# Altium PCB IV_transform_circuit.PcbDoc
Units mil, origin at the board's own origin, x right, y up, seen from the top; angles counter-clockwise.
Board outline 3160 x 1885 mil, 2 copper layers (Top Layer, Bottom Layer); 23 components, 15 nets, 71 pads, 0 vias.
Unrouted connection lines stored in the file: 1.
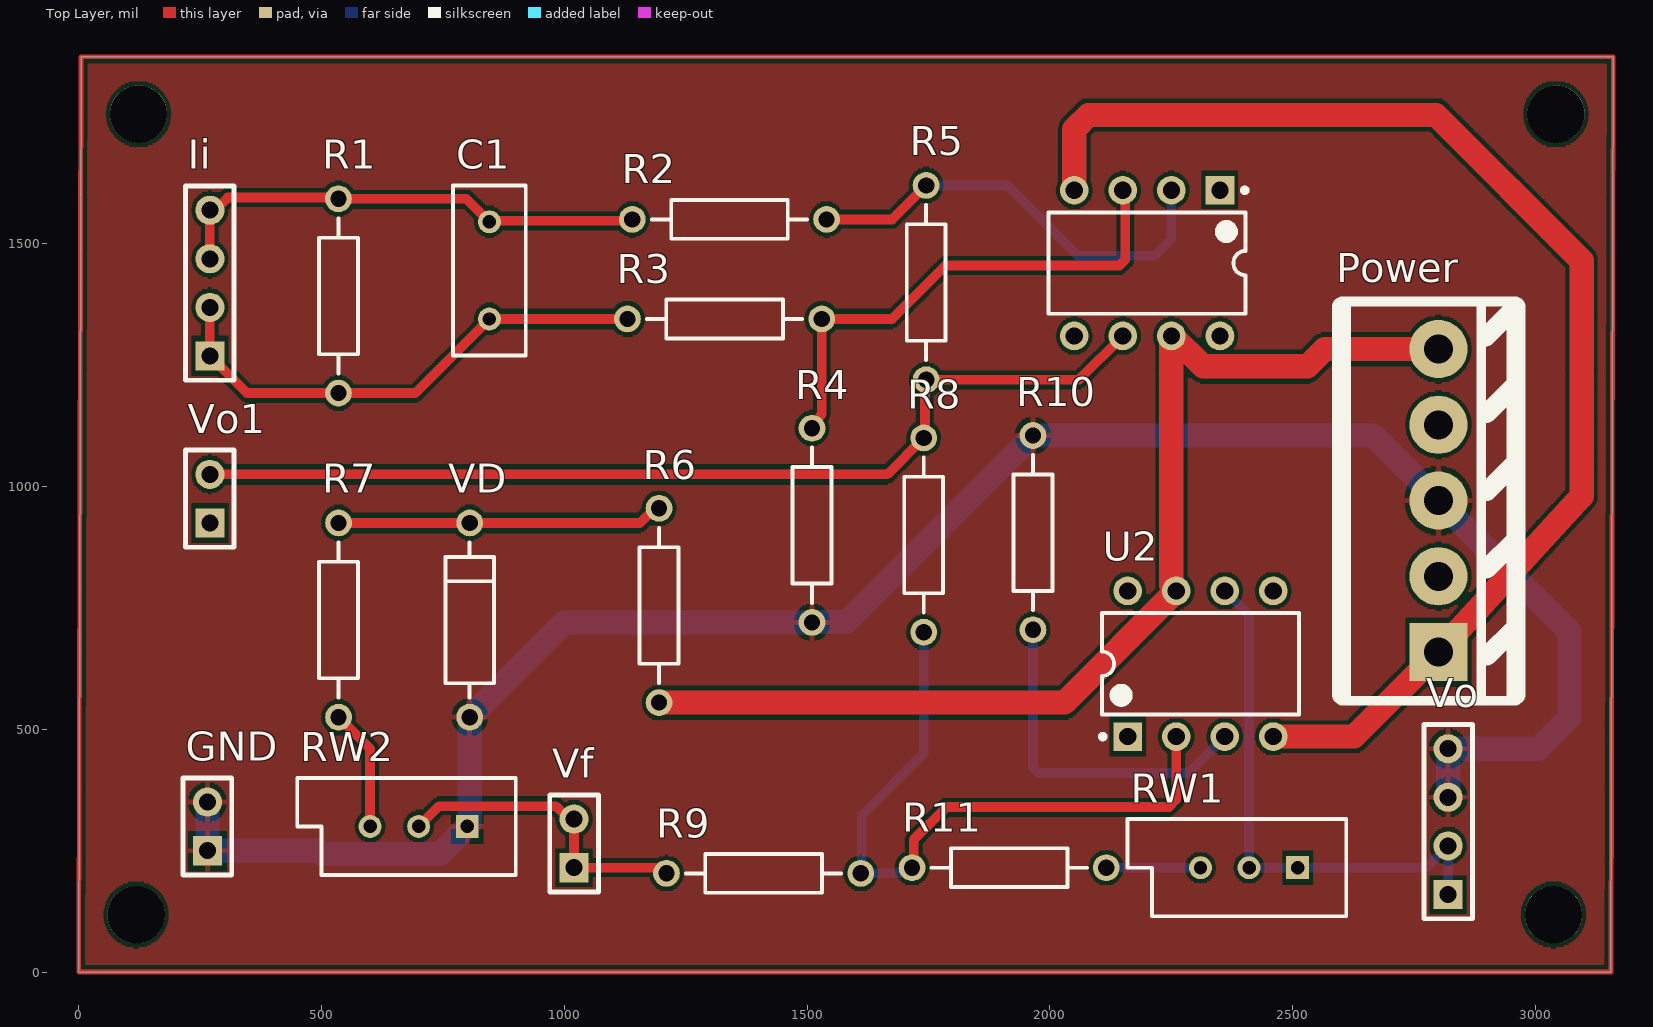
[diagram p0: Top Layer view]
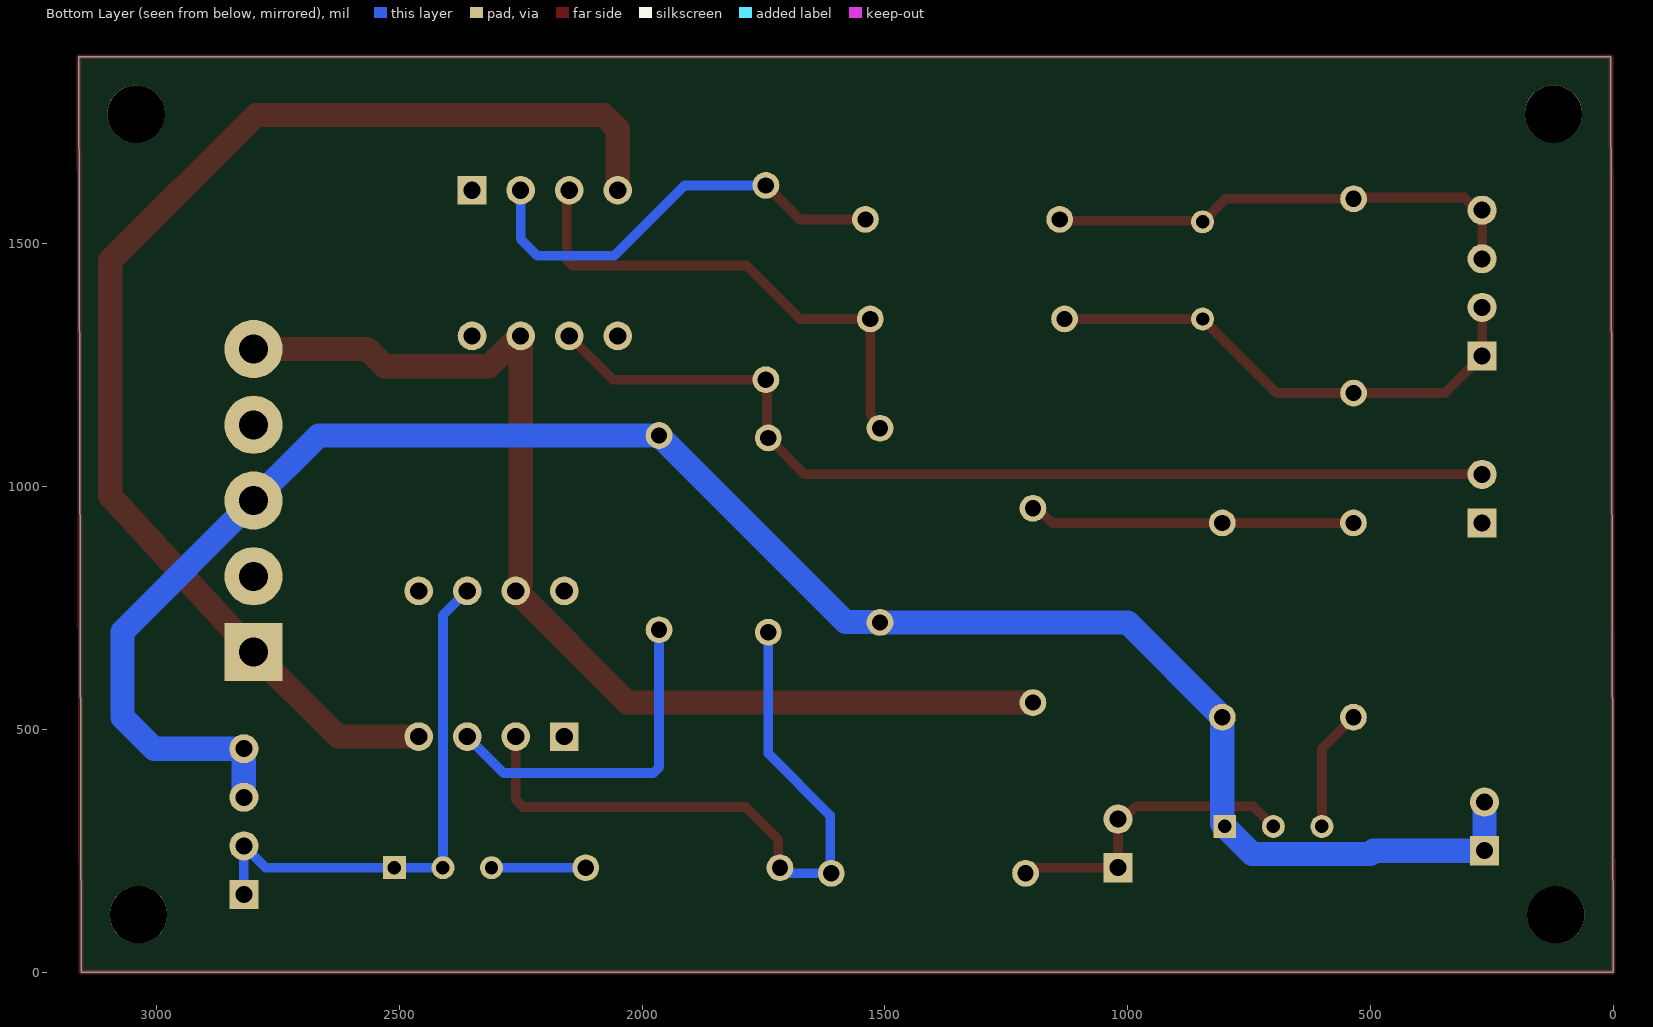
[diagram p1: Bottom Layer view, seen from below]

## Layer stack, top to bottom
Top Solder: solder mask 0.4, Solder Resist, Dk 3.5
Top Layer: signal copper 1.4
Dielectric 1: dielectric 12.6, FR-4, Dk 4.8
Bottom Layer: signal copper 1.4
Bottom Solder: solder mask 0.4, Solder Resist, Dk 3.5

## Board outline
0,0 5,1885 3160,1885 3155,0

## Design rules (kind name [scope] priority, off if disabled: settings)
Clearance ALL [All] p1: gap=8 ignorepadtopadclearanceinfootprint=TRUE
PolygonConnect [All] p1: connectstyle=Relief reliefconductorwidth=10 reliefentries=4 polygonreliefangle="90 Angle" airgapwidth=10
RoutingVias [All] p1: holewidth=20 width=40 viastyle="Through Hole" minholewidth=20 minwidth=40 maxholewidth=20 maxwidth=40
SolderMaskExpansion [All] p1: expansion=2.5 istentingtop=FALSE
Width POWER [InNetClass('POWER')] p1: maxlimit=60 minlimit=30 preferedwidth=50
Width [All] p2: maxlimit=20 minlimit=20 preferedwidth=20
30 further rules are at their usual default settings.

## Classes and differential pairs
net class POWER: +12V -12V GND

## Components (designator, comment, footprint, x,y, rotation, side; value= is the part's Value field where it differs from the comment)
C1 "Cap" RAD-0.2 845.66,1445 r90 top value=100pF
GND "Header 2" SIP-2 265,250 r90 top
Ii "Header 4" SIP-4 270,1268.94 r90 top
Power "Header 5" "POWER PLUG5" 2800,659 r270 top
R1 "" AXIAL-0.4 534.8,1392.38 r90 top value=250
R2 "Res2" AXIAL-0.4 1340,1550 r180 top value=10K
R3 "Res2" AXIAL-0.4 1330,1345 r180 top value=10K
R4 "Res2" AXIAL-0.4 1510,920 r270 top value=10K
R5 "Res2" AXIAL-0.4 1745,1420 r90 top value=10K
R6 "Res2" AXIAL-0.4 1195,755 r270 top value=470
R7 "Res2" AXIAL-0.4 535,725 r90 top value=510
R8 "Res2" AXIAL-0.4 1740,900 r90 top value=10K
R9 "Res2" AXIAL-0.4 1410.3,203.33 r180 top value=10K
R10 "Res2" AXIAL-0.4 1965,905 r90 top value=4.3K
R11 "Res2" AXIAL-0.4 1915.99,215 r180 top value=20K
RW1 "RPot" VR5 2410,215 r180 top value=10K
RW2 "RPot" VR5 700,300 r180 top value=500
U1 "OPAMP" DIP-8 2200,1460 r270 top
U2 "OPAMP" DIP-8 2310,635 r90 top
VD "5.1V" DIODE-0.4 805,725 r90 top
Vf "Header 2" SIP-2 1020,215 r90 top
Vo "Header 4" SIP-4 2820,160 r90 top
Vo1 "Header 2" SIP-2 270,925 r90 top

## Footprints (in the part's own frame and the unit in brackets; to place one, negate y for a bottom-side part, rotate by r counter-clockwise, add the part's x,y. Pads: shape width x height; smd on the part's side, far side on the other; paste and mask are expansions set on the pad)
AXIAL-0.4 [mm] "Axial Device, Thru-Hole; 2 Leads; 0.4 in Pin Spacing"
  round 1.4 hole 0.85: 1(-5.08,0) 2(5.08,0)
  silkscreen extent -4.06,-1.02 4.06,1.02
DIODE-0.4 [mm] "Diode, Thru-Hole; 2 Leads; 0.4 in Pin Spacing"
  round 1.4 hole 0.85: 1(-5.08,0) 2(5.08,0)
  silkscreen extent -4.06,-1.27 4.06,1.27
DIP-8 [mm] "DIP; 8 Leads; Row Spacing 7.62 mm; Pitch 2.54 mm"
  rect 1.5x1.5 hole 0.9: 1(-3.81,3.81)
  round 1.5 hole 0.9: 2(-3.81,1.27) 3(-3.81,-1.27) 4(-3.81,-3.81) 5(3.81,-3.81) 6(3.81,-1.27) 7(3.81,1.27) 8(3.81,3.81)
  silkscreen extent -3.93,-5.15 2.65,5.24, body extent -3.6,-5.15 3.6,5.15, height 5.08
"POWER PLUG5" [mil] "双电源插座"
  rect 120x120 hole 60: 1(0,0)
  round 120 hole 60: 2(-156,0) 3(-312,0) 4(-468,0) 5(-624,0)
  silkscreen extent -722,-200 100,160
RAD-0.2 [mm] "Radial Cap, Thru-Hole; 2 Leads; 0.2 in Pin Spacing"
  round 1.2 hole 0.7: 1(-2.54,0) 2(2.54,0)
  silkscreen extent -4.44,-1.91 4.44,1.91
SIP-2 [mil]
  rect 60x60 hole 35: 1(0,0)
  round 60 hole 35: 2(100,0)
  silkscreen extent -50,-50 150,50
SIP-4 [mil]
  rect 60x60 hole 35: 1(0,0)
  round 60 hole 35: 2(100,0) 3(200,0) 4(300,0)
  silkscreen extent -50,-50 350,50
VR5 [mm] "Thru-Hole; 3 Leads"
  rect 1.2x1.2 hole 0.7: 1(-2.54,0)
  round 1.2 hole 0.7: 2(0,0) 3(2.54,0)
  silkscreen extent -5.08,-2.54 6.35,2.54

## Part data
C1: "Capacitor", LatestRevisionDate=17-Jul-2002, LatestRevisionNote="Re-released for DXP Platform.", PackageDescription="Radial Cap, Thru-Hole; 2 Leads; 0.3 in Pin Spacing", PackageReference=RAD-0.3, Published=8-Jun-2000, Publisher="Altium Limited"
GND Vf Vo1: "Header, 2-Pin", LatestRevisionDate=17-Jul-2002, LatestRevisionNote="Re-released for DXP Platform.", Publisher="Altium Limited"
Ii Vo: "Header, 4-Pin", LatestRevisionDate=17-Jul-2002, LatestRevisionNote="Re-released for DXP Platform.", Publisher="Altium Limited"
Power: "Header, 5-Pin", LatestRevisionDate=17-Jul-2002, LatestRevisionNote="Re-released for DXP Platform.", Publisher="Altium Limited"
R1: library part Res2, "Resistor", LatestRevisionDate=17-Jul-2002, LatestRevisionNote="Re-released for DXP Platform.", PackageDescription="Axial Device, Thru-Hole; 2 Leads; 0.4 in Pin Spacing", PackageReference=AXIAL-0.4, Published=8-Jun-2000, Publisher="Altium Limited"
R2 R3 R4 R5 R6 R7 R8 R9 R10 R11: "Resistor", LatestRevisionDate=17-Jul-2002, LatestRevisionNote="Re-released for DXP Platform.", PackageDescription="Axial Device, Thru-Hole; 2 Leads; 0.4 in Pin Spacing", PackageReference=AXIAL-0.4, Published=8-Jun-2000, Publisher="Altium Limited"
RW1 RW2: "Potentiometer", LatestRevisionDate=17-Jul-2002, LatestRevisionNote="Re-released for DXP Platform.", PackageDescription="Variable Resistor, Thru-Hole; 3 Leads", PackageReference=VR5, Published=8-Jun-2000, Publisher="Altium Limited", Set Position=0.5, Sim Note="Enter the Resistance value and the set point into parameter fields."
U1 U2: "Operational Amplifier"
VD: library part "D Schottky", "Schottky Diode", Code_JEDEC=DO-214-AA, LatestRevisionDate=17-Jul-2002, LatestRevisionNote="Re-released for DXP Platform.", PackageDescription="DO-214-AA/SMB; 2 C-Bend Leads; Body 5.3 x 3.6 mm, inc. leads (LxW)", PackageReference=SMB, Published=8-Jun-2000, Publisher="Altium Limited"

## Free pads (board coordinates)
  round 118.11 hole 118.11 unplated: 3(118.11,118.11) 3(123.11,1766.89) 3(3036.89,118.11) 3(3041.89,1766.89)

## Nets (pads, with @x,y where several pads share a name; then routed paths per layer and width w, separated by ;. In a path a pad name is that pad's centre, name@x,y a point inside that pad or via, vN(x,y) a via of type N, cw(c..) or ccw(c..) an arc to the next point about the centre after c; other vN are vias at no path point)
+12V: Power.5 R6.2 U1.7 U2.7 | length 2280
  Top Layer w50: R6.2 2030,555 U2.7 2260,787.45 2250,797.45 U1.7 2252.45,1310 2314.98,1247.47 2530.25,1247.47 2565.78,1283 Power.5
-12V: Power.1 U1.4 U2.4 | length 2640.1
  Top Layer w50: U1.4 2050,1735.71 2079.29,1765 2795,1765 3095,1465 3095,980 Power.1 2626,485 U2.4
GND: GND.1 GND.2 Power.3 R4.2 R10.2 RW2.1 VD.1 Vo.3 Vo.4 | length 4113.8
  Bottom Layer w50: GND.2 GND.1 493.42,250 500.04,243.38 743.38,243.38 RW2.1 805,305 VD.1 1000,720 R4.2 1510.98,720.98 1580.98,720.98 R10.2 2666,1105 Power.3 3070,701 3070,525 3005,460 Vo.4 Vo.3
NetC1_1: C1.1 Ii.1 Ii.2 R1.1 R3.2 | length 1054.9
  Top Layer w20: Ii.2 Ii.1 346.56,1192.38 R1.1 693.04,1192.38 C1.1 R3.2
NetC1_2: C1.2 Ii.3 Ii.4 R1.2 R2.2 | length 1003.6
  Top Layer w20: Ii.3 Ii.4 280.82,1568.94 306.89,1595 532.18,1595 R1.2 798.28,1592.38 C1.2 848.16,1547.5 1137.5,1547.5 R2.2
NetR2_1: R2.1 R5.2 U1.2 | length 913.6
  Top Layer w20: R2.1 1675,1550 R5.2
  Bottom Layer w20: R5.2 1912.25,1620 2057.25,1475 2215,1475 2250,1510 U1.2
NetR3_1: R3.1 R4.1 U1.3 | length 1061.4
  Top Layer w20: R4.1@1510,1129.5 R4.1 1530,1149.5 R3.1 1675,1345 1785,1455 2143.28,1455 2155,1466.72 2155,1605 U1.3
NetR5_1: R5.1 R8.2 U1.6 Vo1.1 Vo1.2 | length 2065.4
  Top Layer w20: Vo1.2 1665,1025 R8.2 1742.5,1102.5 1742.5,1217.5 R5.1 2060,1220 U1.6
NetR6_1: R6.1 R7.2 VD.2 | length 672.4
  Top Layer w20: R7.2 VD.2 1155.5,925 1185.5,955 R6.1
NetR7_1: R7.1 RW2.3 | length 251.9
  Top Layer w20: R7.1 600,460 RW2.3
NetR8_1: R8.1 R9.1 R11.2 U2.2 | length 1428.2
  Top Layer w20: R11.2 1719.27,218.28 1719.27,272.56 1786.72,340 2245,340 2260,355 U2.2
  Bottom Layer w20: R11.2 1706.49,215 1694.83,203.33 R9.1 1612.65,205.68 1612.65,322.65 1740,450 R8.1 R8.1@1742.5,697.5
NetR9_2: R9.2 RW2.2 Vf.1 Vf.2 | length 643.4
  Top Layer w20: RW2.2 741.62,341.62 982.55,341.62 1009.18,315 Vf.2 Vf.1 1189.14,215 1200.8,203.33 R9.2
NetR10_1: R10.1 U2.3 | length 714.2
  Bottom Layer w20: R10.1 1965,421.72 1976.72,410 2285,410 U2.3
NetR11_1: R11.1 RW1.3 | length 194
  Bottom Layer w20: R11.1 RW1.3
NetRW1_1: RW1.1 RW1.2 U2.6 Vo.1 Vo.2 | length 1119.4
  Bottom Layer w20: U2.6 2410,735 RW1.2 RW1.1 2775,215 Vo.2 Vo.1
pads on no net: Power.2 Power.4 U1.1 U1.5 U1.8 U2.1 U2.5 U2.8
copper on no net: | length 10080
  Top Layer w10: 0,0 3155,0 3160,1885 5,1885 0,0

## Polygon pours and split planes (outlines as drawn)
GND on Top Layer "GND_L01_P001" (hatched Horizontal grid 4 track 5, remove dead copper, pour order 1): 5,1885 3160,1885 3155,1880 3155,0 0,0